# EAGLE board Sistema de Alarme Inator (EAGLE 9.7.0)

Size 176.07 x 154.44 mm. Coordinates in mm from the lower left corner, seen from the top.
Outline: 0,0 176.07,0 176.07,154.44 0,154.44 0,0
Copper layers (1*16): Top 0.035mm / dielectric 1.5mm / Bottom 0.035mm
Design rules "default": minimum track width 6mil, minimum drill 0.35mm, track to track 6mil, track to pad 6mil, pad to pad 6mil, via to via 6mil, smd to smd 6mil, copper to edge 40mil, drill to drill 6mil, minimum pad ring 10mil, minimum via ring 8mil, stop-mask expansion 4mil, vias tented up to drill 0mil, thermal gap 10mil

## Footprints (pad centres in the part's own frame; a part is rotated, then mirrored left to right if it is on the bottom)
LEDRD254W60D565H860B = drill 0.981 pad 1.581: 1 -1.27,0; 2 1.27,0
PIEZO = drill 1 pad 1.6: 1 -3.5,0; 2 3.5,0
GL5528 = drill 0.8 pad 1.4: 1 -1.702,0; 2 1.702,0
RESAD1016W63L850D250B = drill 0.83 pad 1.43: 1 -5.08,0; 2 5.08,0
HA-06-SM065 = drill 1 pad 1.676: 1 -2.54,-2.54; 2 0,2.54; 3 2.54,-2.54
SWITCH-MOMENTARY-PTH-6.5MM = drill 1.016 pad 1.88: 1 -3.251,2.261; 2 3.251,2.261; 3 -3.251,-2.261; 4 3.251,-2.261
ARDUINO-UNO-R3-SHIELD = drill 1.016 pad 1.88: 3.3V 24.13,-2.54; 5V 24.13,0; A0 24.13,12.7; A1 24.13,15.24; A2 24.13,17.78; A3 24.13,20.32; A4 24.13,22.86; A5 24.13,25.4; AREF -24.13,-13.97; D2 -24.13,20.32; D3 -24.13,17.78; D4 -24.13,15.24; D5 -24.13,12.7; D6 -24.13,10.16; D7 -24.13,7.62; D8 -24.13,3.81; D9 -24.13,1.27; D10 -24.13,-1.27; D11 -24.13,-3.81; D12 -24.13,-6.35; D13 -24.13,-8.89; GND@0 24.13,2.54; GND@1 24.13,5.08; GND@2 -24.13,-11.43; IOREF 24.13,-7.62; NC 24.13,-10.16; RES 24.13,-5.08; RX -24.13,25.4; SCL -24.13,-19.05; SDA -24.13,-16.51; TX -24.13,22.86; VIN 24.13,7.62
TO92 = drill 0.813 octagon: 1 -1.27,0; 2 0,1.905; 3 1.27,0
JHD-162A = drill 1.016 long: 1 -19.05,0; 2 -16.51,0; 3 -13.97,0; 4 -11.43,0; 5 -8.89,0; 6 -6.35,0; 7 -3.81,0; 8 -1.27,0; 9 1.27,0; 10 3.81,0; 11 6.35,0; 12 8.89,0; 13 11.43,0; 14 13.97,0; 15 16.51,0; 16 19.05,0

## Placement (x,y rotation side)
D1  RED  [LEDRD254W60D565H860B]  120.83,84.91 180 top
PIEZO1  PIEZO  [PIEZO]  105.44,112.91 0 top
R1  PHOTOCELL_GL5528  [GL5528]  107.18,147.46 0 top
R2  1k  [RESAD1016W63L850D250B]  109.4,64.59 90 top
R3  5k  [RESAD1016W63L850D250B]  119.56,100.15 270 top
RPOT1  10k  [HA-06-SM065]  122.1,72.21 0 top
S1  SWITCH_MOMENTARY  [SWITCH-MOMENTARY-PTH-6.5MM]  137.34,88.72 90 top
S2  SWITCH_MOMENTARY  [SWITCH-MOMENTARY-PTH-6.5MM]  147.5,88.72 90 top
S3  SWITCH_MOMENTARY  [SWITCH-MOMENTARY-PTH-6.5MM]  157.66,88.72 90 top
S4  SWITCH_MOMENTARY  [SWITCH-MOMENTARY-PTH-6.5MM]  167.82,88.72 90 top
U1  ARDUINO-UNO-R3-SHIELD  [ARDUINO-UNO-R3-SHIELD]  47.88,81.68 270 top
U2  TMP36GT9Z_TO92  [TO92]  88.36,96.23 0 top
U3  LCD-16X2JHD-162A  [JHD-162A]  31.72,36.63 0 top

## Library data of the parts
D1 = Tinkercad; CATEGORY: Opto-Electronic; SUB-CATEGORY: LED; VALUE: LED_RED
PIEZO1 R1-R3 RPOT1 S1-S4 U1-U3 = Tinkercad

## Nets
D1_C: D1.2 R3.2
U1_5V: R1.1 RPOT1.1 U1.5V U2.3 U3.2
U1_A0: R1.2 R2.2 U1.A0
U1_A1: U1.A1 U2.2
U1_A2: U1.A2 U3.13
U1_A3: U1.A3 U3.14
U1_D2: S1.1 S1.2 U1.D2
U1_D3: S2.1 S2.2 U1.D3
U1_D4: S3.1 S3.2 U1.D4
U1_D5: S4.1 S4.2 U1.D5
U1_D8: PIEZO1.1 U1.D8
U1_D9: D1.1 U1.D9
U1_D10: U1.D10 U3.4
U1_D11: U1.D11 U3.6
U1_D12: U1.D12 U3.11
U1_D13: U1.D13 U3.12
U1_GND: PIEZO1.2 R2.1 R3.1 RPOT1.3 S1.3 S1.4 S2.3 S2.4 S3.3 S3.4 S4.3 S4.4 U1.GND@0 U1.GND@1 U1.GND@2 U2.1 U3.1 U3.5
U3_VO: RPOT1.2 U3.3

## Tracks (layer width: path | path; a pad name or v marks a point on that pad's centre or on a via)
D1_C  (1 unrouted)
U1_5V  (4 unrouted)
U1_A0  (2 unrouted)
U1_A1  (1 unrouted)
U1_A2  (1 unrouted)
U1_A3  (1 unrouted)
U1_D2  (2 unrouted)
U1_D3  (2 unrouted)
U1_D4  (2 unrouted)
U1_D5  (2 unrouted)
U1_D8  (1 unrouted)
U1_D9  (1 unrouted)
U1_D10  (1 unrouted)
U1_D11  (1 unrouted)
U1_D12  (1 unrouted)
U1_D13  (1 unrouted)
U1_GND  (17 unrouted)
U3_VO  (1 unrouted)